# EAGLE board sch1 (EAGLE 9.6.2)

Size 138.53 x 80 mm. Coordinates in mm from the lower left corner, seen from the top.
Outline: 38.53,0 138.53,0 138.53,80 38.53,80 38.53,0
Copper layers (1*16): Top 0.035mm / dielectric 1.5mm / Bottom 0.035mm
Design rules "default": minimum track width 6mil, minimum drill 0.35mm, track to track 6mil, track to pad 6mil, pad to pad 6mil, via to via 6mil, smd to smd 6mil, copper to edge 40mil, drill to drill 6mil, minimum pad ring 10mil, minimum via ring 8mil, stop-mask expansion 4mil, vias tented up to drill 0mil, thermal gap 10mil

## Footprints (pad centres in the part's own frame; a part is rotated, then mirrored left to right if it is on the bottom)
M5STAMP-PICO = drill 1 pad 1.778: 3V3 7.62,2.54; EN 7.62,-5.08; G0 7.62,-7.62; G1 7.62,0; G3 7.62,-2.54; G18 -7.62,5.08; G19 -7.62,2.54; G21 -7.62,0; G22 -7.62,-2.54; G25 -7.62,-5.08; G26 -7.62,10.16; G32 1.27,-10.16; G33 3.81,-10.16; G36 -7.62,7.62 | drill 1 pad 1.778 octagon: 5V0 -1.27,-10.16; 5V1 -7.62,-7.62 | drill 1 pad 1.778 square: GND0 -3.81,-10.16; GND1 -7.62,-10.16; GND2 7.62,-10.16
SK6812MINI-E = smd 1.5 x 0.9: DIN 3.6,0.75; DOUT -3.6,-0.75; GND 3.6,-0.75; VDD -3.6,0.75
JST-PH2 = drill 0.9 pad 1.676 square: 1 -1,0 | drill 0.9 pad 1.5: 2 1,0
0204/7 = drill 0.813 octagon: 1 -3.81,0; 2 3.81,0
PINHEAD-MA02-1 = drill 0.9 pad 1.5: 1 -1.27,0; 2 1.27,0

## Placement (x,y rotation side)
M5PICO1  M5STAMP-PICO  [M5STAMP-PICO]  15.67,12.7 0 top
NP1  NEOPIXEL-SK6812MINI-E  [SK6812MINI-E]  11.86,27.94 0 top
NP2  NEOPIXEL-SK6812MINI-E  [SK6812MINI-E]  1.7,27.94 0 top
NP3  NEOPIXEL-SK6812MINI-E  [SK6812MINI-E]  20.75,35.56 0 top
NP4  NEOPIXEL-SK6812MINI-E  [SK6812MINI-E]  10.59,35.56 0 top
NP5  NEOPIXEL-SK6812MINI-E  [SK6812MINI-E]  20.75,40.64 0 top
P1  BATTERY  [JST-PH2]  2.97,2.54 0 top
R1  [0204/7]  10.59,39.37 0 top
SV1  SENSOR  [PINHEAD-MA02-1]  19.48,29.21 0 top

## Library data of the parts
M5PICO1 = ytani1; URL: https://shop.m5stack.com/collections/m5stack-new-arrival/products/m5stamp-pico-mate-with-pin-headers?variant=40279458840748
NP1-NP5 P1 SV1 = ytani1
R1 = rcl; SPICEPREFIX: R

## Nets
+5V: M5PICO1.5V0 M5PICO1.5V1 NP1.VDD NP2.VDD NP3.VDD NP4.VDD NP5.VDD P1.1 R1.1
GND: M5PICO1.GND0 M5PICO1.GND1 M5PICO1.GND2 NP1.GND NP2.GND NP3.GND NP4.GND NP5.GND P1.2 SV1.2
N$1: NP1.DOUT NP2.DIN
N$2: NP2.DOUT NP3.DIN
N$3: NP3.DOUT NP4.DIN
N$4: NP4.DOUT NP5.DIN
N$5: M5PICO1.G25 NP1.DIN
N$6: M5PICO1.G33 R1.2 SV1.1

## Tracks (layer width: path | path; a pad name or v marks a point on that pad's centre or on a via)
+5V  (8 unrouted)
GND  (9 unrouted)
N$1  (1 unrouted)
N$2  (1 unrouted)
N$3  (1 unrouted)
N$4  (1 unrouted)
N$5  (1 unrouted)
N$6  (2 unrouted)